# EAGLE board Weather Shield-Panel-v11 (EAGLE 6.5.0)
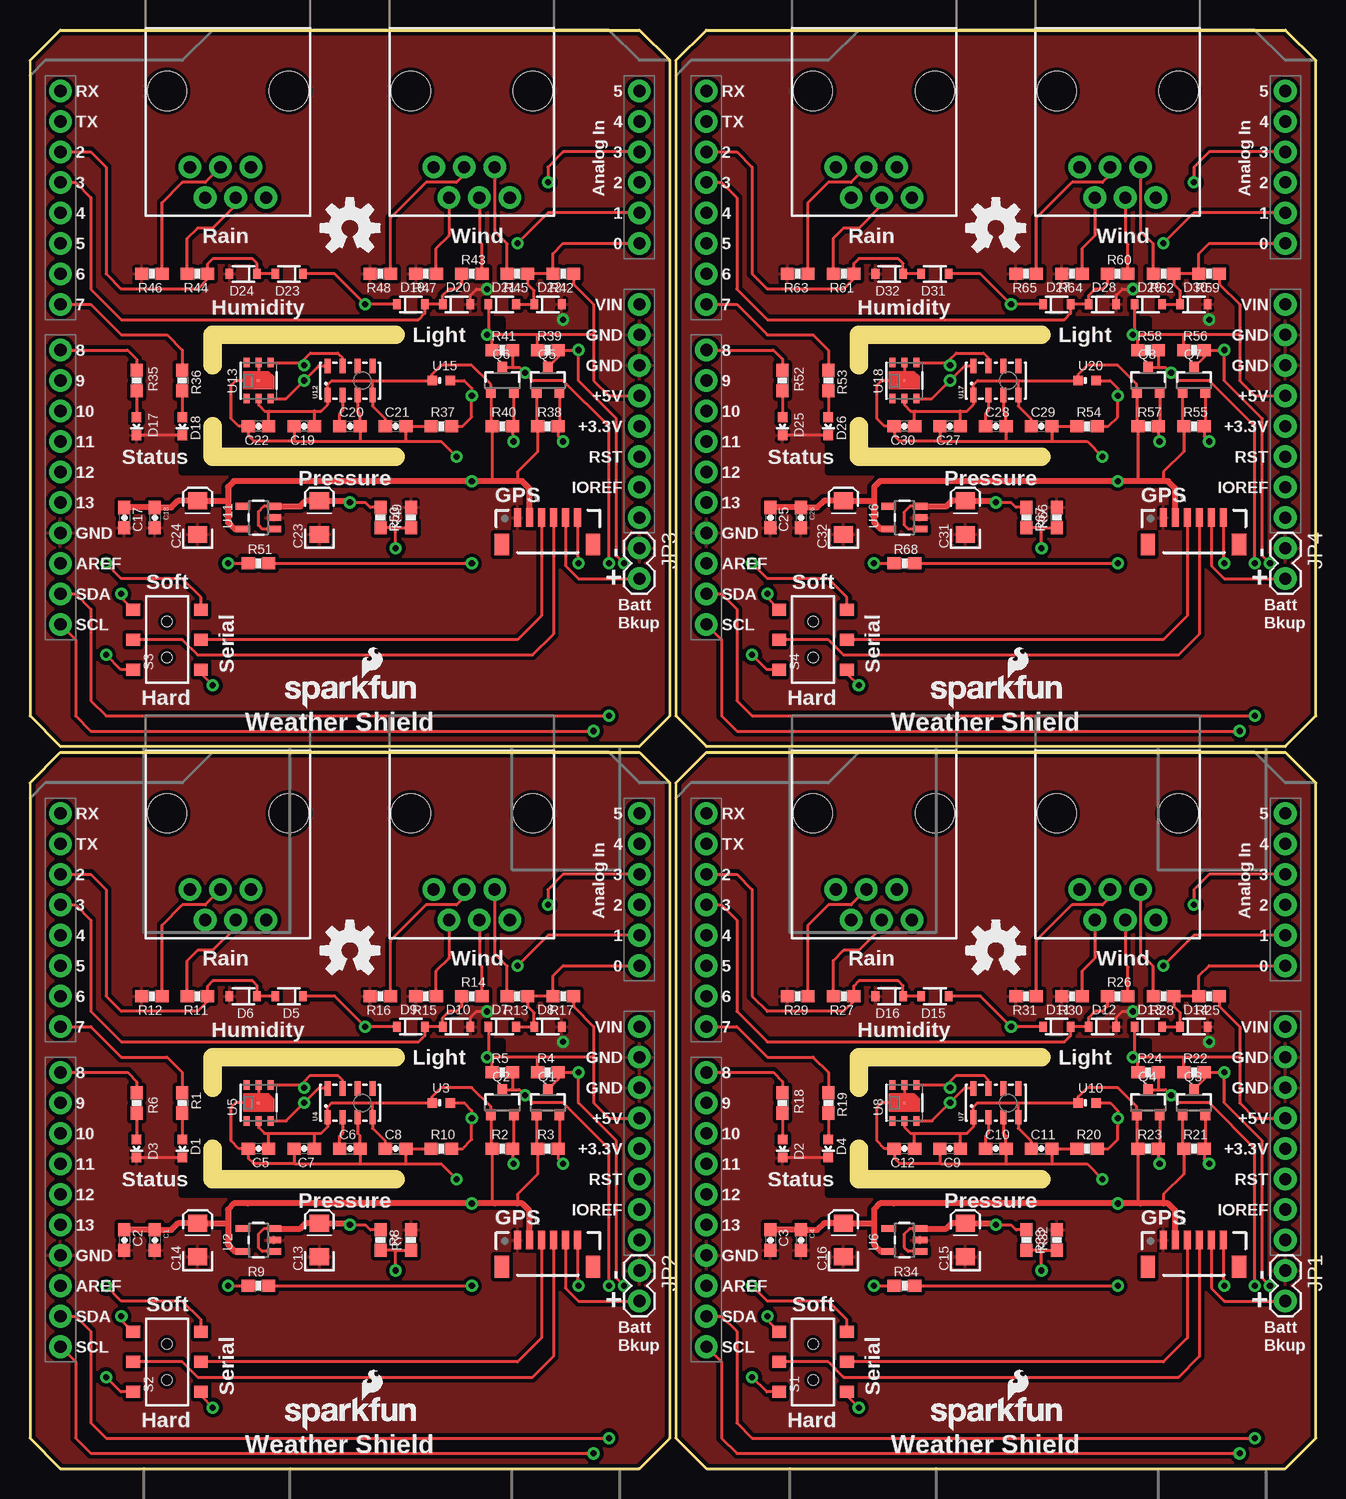
[diagram p0: board, top side]
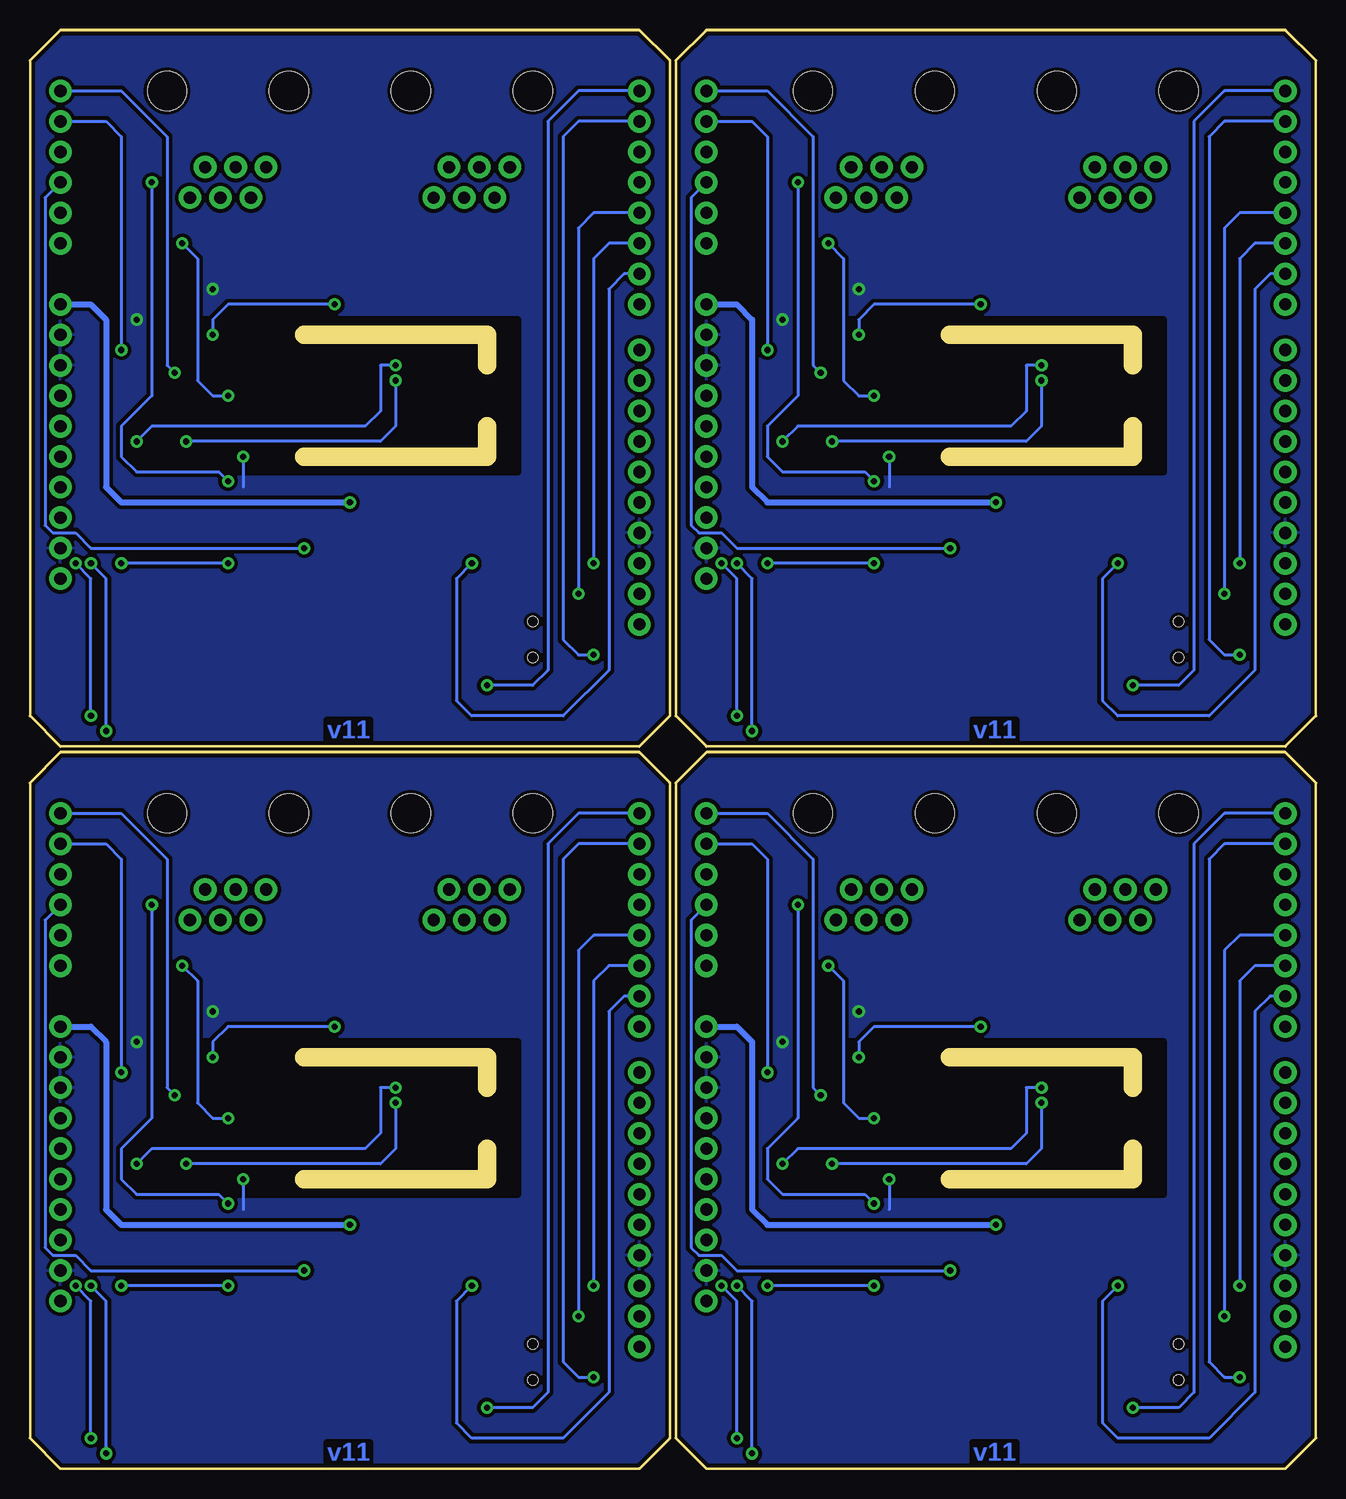
[diagram p1: board, bottom side, seen from below]

Size 107.19 x 119.89 mm. Coordinates in mm from the lower left corner, seen from the top.
Outline: 53.34,2.54 53.34,57.15 50.8,59.69 2.54,59.69 0,57.15 0,2.54 2.54,0 50.8,0 53.34,2.54
Outline: 107.19,2.54 107.19,57.15 104.65,59.69 56.39,59.69 53.85,57.15 53.85,2.54 56.39,0 104.65,0 107.19,2.54
Outline: 53.34,62.74 53.34,117.35 50.8,119.89 2.54,119.89 0,117.35 0,62.74 2.54,60.2 50.8,60.2 53.34,62.74
Outline: 107.19,62.74 107.19,117.35 104.65,119.89 56.39,119.89 53.85,117.35 53.85,62.74 56.39,60.2 104.65,60.2 107.19,62.74
Copper layers (1*16): Top 0.035mm / dielectric 1.5mm / Bottom 0.035mm
Design rules "SparkFun": minimum track width 8mil, minimum drill 20mil, track to track 8mil, track to pad 8mil, pad to pad 8mil, via to via 8mil, smd to smd 8mil, copper to edge 10mil, drill to drill 8mil, minimum pad ring 12mil, minimum via ring 10mil, stop-mask expansion 4mil, vias tented up to drill 20mil, thermal gap 10mil
Net classes: 0 Default: width 0.203 mm; 1 vcc: width 0.203 mm
tRestrict: area 12.7,22.9 to 39.4,35.6; area 66.5,22.9 to 93.2,35.6; area 12.7,83.1 to 39.4,95.8; area 66.5,83.1 to 93.2,95.8
bRestrict: area 12.7,22.9 to 39.4,35.6; area 66.5,22.9 to 93.2,35.6; area 12.7,83.1 to 39.4,95.8; area 66.5,83.1 to 93.2,95.8
Milling: 16 lines

## Footprints (pad centres in the part's own frame; a part is rotated, then mirrored left to right if it is on the bottom)
0603-CAP = smd 1.1 x 1: 1 -0.85,0; 2 0.85,0
EIA3216 = smd 1.4 x 1.6: A 1.4,0; C -1.4,0
LED-0603 = smd 0.8 x 0.8: A 0,-0.75; C 0,0.75
SOD-323 = smd 0.63 x 0.83: 1 -1.15,0; 2 1.15,0
GP-635T = smd 0.6 x 1.55: 1 -2.54,1.27; 2 -1.54,1.27; 3 -0.54,1.27; 4 0.46,1.27; 5 1.46,1.27; 6 2.46,1.27 | smd 1.2 x 1.8: P$1 -3.84,-0.955; P$2 3.76,-0.955
1X02 = drill 1.016 pad 1.88: 1 0,0; 2 2.54,0
RJ11-6 = drill 1.016 pad 1.88: 1 1.905,8.89; 2 3.175,6.35; 3 4.445,8.89; 4 5.715,6.35; 5 6.985,8.89; 6 8.255,6.35 | hole 3.251: 0,0; 10.16,0
SOT23-3 = smd 0.8 x 0.9: 1 -0.95,-1; 2 0.95,-1; 3 0,1.1
0603-RES = smd 1.1 x 1: 1 -0.85,0; 2 0.85,0
AYZ0202 = smd 1 x 1.15: 1 -2.5,2.825; 2 0,2.825; 3 2.5,2.825; 4 -2.5,-2.825; 5 0,-2.825; 6 2.5,-2.825 | hole 0.85: 1.5,0; -1.5,0
UNO_R3_SHIELD = drill 1.016 pad 1.88: 3.3V 50.8,26.67; 5V 50.8,29.21; A0 50.8,41.91; A1 50.8,44.45; A2 50.8,46.99; A3 50.8,49.53; A4 50.8,52.07; A5 50.8,54.61; AREF 2.54,15.24; D2 2.54,49.53; D3 2.54,46.99; D4 2.54,44.45; D5 2.54,41.91; D6 2.54,39.37; D7 2.54,36.83; D8 2.54,33.02; D9 2.54,30.48; D10 2.54,27.94; D11 2.54,25.4; D12 2.54,22.86; D13 2.54,20.32; GND@0 50.8,31.75; GND@1 50.8,34.29; GND@2 2.54,17.78; IOREF 50.8,21.59; NC 50.8,19.05; RES 50.8,24.13; RX 2.54,54.61; SCL 2.54,10.16; SDA 2.54,12.7; TX 2.54,52.07; VIN 50.8,36.83
SOT23-5 = smd 0.55 x 1.2: 1 -0.95,-1.3; 2 0,-1.3; 3 0.95,-1.3; 4 0.95,1.3; 5 -0.95,1.3
ALS-PT19 = smd 0.8 x 0.8: C -0.75,0; E 0.75,0
LGA8 = smd 1.2 x 0.5: 1 -1.2,1.875; 2 -1.2,0.625; 3 -1.2,-0.625; 4 -1.2,-1.875; 5 1.2,-1.875; 6 1.2,-0.625; 7 1.2,0.625; 8 1.2,1.875
HTU21D = smd 0.2 x 0.2: 7 0,0 | smd 0.8 x 0.5: DATA 1.5,-1; GND 1.5,0; NC@1 -1.5,1; NC@6 1.5,1; SCK -1.5,-1; VDD -1.5,0

## Placement (x,y rotation side)
C1  1uF  [0603-CAP]  10.41,19.05 270 top
C2  0.1uF  [0603-CAP]  7.87,19.05 270 top
C3  0.1uF  [0603-CAP]  61.72,19.05 270 top
C4  1uF  [0603-CAP]  64.26,19.05 270 top
C5  0.1uF  [0603-CAP]  19.05,26.67 180 top
C6  0.1uF  [0603-CAP]  26.67,26.67 0 top
C7  0.1uF  [0603-CAP]  22.86,26.67 180 top
C8  1uF  [0603-CAP]  30.48,26.67 0 top
C9  0.1uF  [0603-CAP]  76.71,26.67 180 top
C10  0.1uF  [0603-CAP]  80.52,26.67 0 top
C11  1uF  [0603-CAP]  84.33,26.67 0 top
C12  0.1uF  [0603-CAP]  72.9,26.67 180 top
C13  10uF  [EIA3216]  24.13,19.05 90 top
C14  10uF  [EIA3216]  13.97,19.05 90 top
C15  10uF  [EIA3216]  77.98,19.05 90 top
C16  10uF  [EIA3216]  67.82,19.05 90 top
C17  0.1uF  [0603-CAP]  7.87,79.25 270 top
C18  1uF  [0603-CAP]  10.41,79.25 270 top
C19  0.1uF  [0603-CAP]  22.86,86.87 180 top
C20  0.1uF  [0603-CAP]  26.67,86.87 0 top
C21  1uF  [0603-CAP]  30.48,86.87 0 top
C22  0.1uF  [0603-CAP]  19.05,86.87 180 top
C23  10uF  [EIA3216]  24.13,79.25 90 top
C24  10uF  [EIA3216]  13.97,79.25 90 top
C25  0.1uF  [0603-CAP]  61.72,79.25 270 top
C26  1uF  [0603-CAP]  64.26,79.25 270 top
C27  0.1uF  [0603-CAP]  76.71,86.87 180 top
C28  0.1uF  [0603-CAP]  80.52,86.87 0 top
C29  1uF  [0603-CAP]  84.33,86.87 0 top
C30  0.1uF  [0603-CAP]  72.9,86.87 180 top
C31  10uF  [EIA3216]  77.98,79.25 90 top
C32  10uF  [EIA3216]  67.82,79.25 90 top
D1  Blue  [LED-0603]  12.7,26.67 180 top
D2  Green  [LED-0603]  62.74,26.67 180 top
D3  Green  [LED-0603]  8.89,26.67 180 top
D4  Blue  [LED-0603]  66.55,26.67 180 top
D5  BAS16  [SOD-323]  21.59,39.37 180 top
D6  BAS16  [SOD-323]  17.78,39.37 180 top
D7  BAS16  [SOD-323]  39.37,36.83 0 top
D8  BAS16  [SOD-323]  43.18,36.83 0 top
D9  BAS16  [SOD-323]  31.75,36.83 0 top
D10  BAS16  [SOD-323]  35.56,36.83 0 top
D11  BAS16  [SOD-323]  85.6,36.83 0 top
D12  BAS16  [SOD-323]  89.41,36.83 0 top
D13  BAS16  [SOD-323]  93.22,36.83 0 top
D14  BAS16  [SOD-323]  97.03,36.83 0 top
D15  BAS16  [SOD-323]  75.44,39.37 180 top
D16  BAS16  [SOD-323]  71.63,39.37 180 top
D17  Green  [LED-0603]  8.89,86.87 180 top
D18  Blue  [LED-0603]  12.7,86.87 180 top
D19  BAS16  [SOD-323]  31.75,97.03 0 top
D20  BAS16  [SOD-323]  35.56,97.03 0 top
D21  BAS16  [SOD-323]  39.37,97.03 0 top
D22  BAS16  [SOD-323]  43.18,97.03 0 top
D23  BAS16  [SOD-323]  21.59,99.57 180 top
D24  BAS16  [SOD-323]  17.78,99.57 180 top
D25  Green  [LED-0603]  62.74,86.87 180 top
D26  Blue  [LED-0603]  66.55,86.87 180 top
D27  BAS16  [SOD-323]  85.6,97.03 0 top
D28  BAS16  [SOD-323]  89.41,97.03 0 top
D29  BAS16  [SOD-323]  93.22,97.03 0 top
D30  BAS16  [SOD-323]  97.03,97.03 0 top
D31  BAS16  [SOD-323]  75.44,99.57 180 top
D32  BAS16  [SOD-323]  71.63,99.57 180 top
J1  GP-635T  [GP-635T]  43.18,17.78 0 top
J2  GP-635T  [GP-635T]  97.03,17.78 0 top
J3  GP-635T  [GP-635T]  43.18,77.98 0 top
J4  GP-635T  [GP-635T]  97.03,77.98 0 top
JP1  External Batt Bckup  [1X02]  104.65,16.51 270 top
JP2  External Batt Bckup  [1X02]  50.8,16.51 270 top
JP3  External Batt Bckup  [1X02]  50.8,76.71 270 top
JP4  External Batt Bckup  [1X02]  104.65,76.71 270 top
JP9-DNP  RJ11-RAIN  [RJ11-6]  21.59,54.61 180 top
JP9-DNP1  RJ11-RAIN  [RJ11-6]  75.44,54.61 180 top
JP9-DNP2  RJ11-RAIN  [RJ11-6]  21.59,114.81 180 top
JP9-DNP3  RJ11-RAIN  [RJ11-6]  75.44,114.81 180 top
JP10-DNP  RJ11-WIND  [RJ11-6]  41.91,54.61 180 top
JP10-DNP1  RJ11-WIND  [RJ11-6]  95.76,54.61 180 top
JP10-DNP2  RJ11-WIND  [RJ11-6]  41.91,114.81 180 top
JP10-DNP3  RJ11-WIND  [RJ11-6]  95.76,114.81 180 top
LOGO1  OSHW-LOGOM  [OSHW-LOGO-M]  26.67,43.18 0 top
LOGO2  SFE_LOGO_NAME_FLAME.1_INCH  [SFE_LOGO_NAME_FLAME_.1]  20.83,3.05 0 top
LOGO3  SFE_LOGO_NAME_FLAME.1_INCH  [SFE_LOGO_NAME_FLAME_.1]  74.68,3.05 0 top
LOGO4  OSHW-LOGOM  [OSHW-LOGO-M]  80.52,43.18 0 top
LOGO5  SFE_LOGO_NAME_FLAME.1_INCH  [SFE_LOGO_NAME_FLAME_.1]  20.83,63.25 0 top
LOGO6  OSHW-LOGOM  [OSHW-LOGO-M]  26.67,103.38 0 top
LOGO7  SFE_LOGO_NAME_FLAME.1_INCH  [SFE_LOGO_NAME_FLAME_.1]  74.68,63.25 0 top
LOGO8  OSHW-LOGOM  [OSHW-LOGO-M]  80.52,103.38 0 top
Q1  BSS138  [SOT23-3]  43.18,30.48 0 top
Q2  BSS138  [SOT23-3]  39.37,30.48 0 top
Q3  BSS138  [SOT23-3]  97.03,30.48 0 top
Q4  BSS138  [SOT23-3]  93.22,30.48 0 top
Q5  BSS138  [SOT23-3]  43.18,90.68 0 top
Q6  BSS138  [SOT23-3]  39.37,90.68 0 top
Q7  BSS138  [SOT23-3]  97.03,90.68 0 top
Q8  BSS138  [SOT23-3]  93.22,90.68 0 top
R1  1K  [0603-RES]  12.7,30.48 270 top
R2  4.7K  [0603-RES]  39.37,26.67 0 top
R3  4.7K  [0603-RES]  43.18,26.67 0 top
R4  4.7K  [0603-RES]  43.18,33.02 0 top
R5  4.7K  [0603-RES]  39.37,33.02 0 top
R6  1K  [0603-RES]  8.89,30.48 270 top
R7  1K  [0603-RES]  31.75,19.05 90 top
R8  3.9K  [0603-RES]  29.21,19.05 270 top
R9  4.7K  [0603-RES]  19.05,15.24 0 top
R10  10K  [0603-RES]  34.29,26.67 0 top
R11  1K  [0603-RES]  13.97,39.37 180 top
R12  1K  [0603-RES]  10.16,39.37 180 top
R13  1K  [0603-RES]  40.64,39.37 180 top
R14  1K  [0603-RES]  36.83,39.37 0 top
R15  1K  [0603-RES]  33.02,39.37 180 top
R16  1K  [0603-RES]  29.21,39.37 180 top
R17  4.7K  [0603-RES]  44.45,39.37 180 top
R18  1K  [0603-RES]  62.74,30.48 270 top
R19  1K  [0603-RES]  66.55,30.48 270 top
R20  10K  [0603-RES]  88.14,26.67 0 top
R21  4.7K  [0603-RES]  97.03,26.67 0 top
R22  4.7K  [0603-RES]  97.03,33.02 0 top
R23  4.7K  [0603-RES]  93.22,26.67 0 top
R24  4.7K  [0603-RES]  93.22,33.02 0 top
R25  4.7K  [0603-RES]  98.3,39.37 180 top
R26  1K  [0603-RES]  90.68,39.37 0 top
R27  1K  [0603-RES]  67.82,39.37 180 top
R28  1K  [0603-RES]  94.49,39.37 180 top
R29  1K  [0603-RES]  64.01,39.37 180 top
R30  1K  [0603-RES]  86.87,39.37 180 top
R31  1K  [0603-RES]  83.06,39.37 180 top
R32  1K  [0603-RES]  85.6,19.05 90 top
R33  3.9K  [0603-RES]  83.06,19.05 270 top
R34  4.7K  [0603-RES]  72.9,15.24 0 top
R35  1K  [0603-RES]  8.89,90.68 270 top
R36  1K  [0603-RES]  12.7,90.68 270 top
R37  10K  [0603-RES]  34.29,86.87 0 top
R38  4.7K  [0603-RES]  43.18,86.87 0 top
R39  4.7K  [0603-RES]  43.18,93.22 0 top
R40  4.7K  [0603-RES]  39.37,86.87 0 top
R41  4.7K  [0603-RES]  39.37,93.22 0 top
R42  4.7K  [0603-RES]  44.45,99.57 180 top
R43  1K  [0603-RES]  36.83,99.57 0 top
R44  1K  [0603-RES]  13.97,99.57 180 top
R45  1K  [0603-RES]  40.64,99.57 180 top
R46  1K  [0603-RES]  10.16,99.57 180 top
R47  1K  [0603-RES]  33.02,99.57 180 top
R48  1K  [0603-RES]  29.21,99.57 180 top
R49  1K  [0603-RES]  31.75,79.25 90 top
R50  3.9K  [0603-RES]  29.21,79.25 270 top
R51  4.7K  [0603-RES]  19.05,75.44 0 top
R52  1K  [0603-RES]  62.74,90.68 270 top
R53  1K  [0603-RES]  66.55,90.68 270 top
R54  10K  [0603-RES]  88.14,86.87 0 top
R55  4.7K  [0603-RES]  97.03,86.87 0 top
R56  4.7K  [0603-RES]  97.03,93.22 0 top
R57  4.7K  [0603-RES]  93.22,86.87 0 top
R58  4.7K  [0603-RES]  93.22,93.22 0 top
R59  4.7K  [0603-RES]  98.3,99.57 180 top
R60  1K  [0603-RES]  90.68,99.57 0 top
R61  1K  [0603-RES]  67.82,99.57 180 top
R62  1K  [0603-RES]  94.49,99.57 180 top
R63  1K  [0603-RES]  64.01,99.57 180 top
R64  1K  [0603-RES]  86.87,99.57 180 top
R65  1K  [0603-RES]  83.06,99.57 180 top
R66  1K  [0603-RES]  85.6,79.25 90 top
R67  3.9K  [0603-RES]  83.06,79.25 270 top
R68  4.7K  [0603-RES]  72.9,75.44 0 top
S1  Serial Select  [AYZ0202]  65.28,8.89 90 top
S2  Serial Select  [AYZ0202]  11.43,8.89 90 top
S3  Serial Select  [AYZ0202]  11.43,69.09 90 top
S4  Serial Select  [AYZ0202]  65.28,69.09 90 top
U1  ARDUINO_R3_SHIELD  [UNO_R3_SHIELD]  0,0 0 top
U2  3.3V MIC5219  [SOT23-5]  19.05,19.05 90 top
U3  ALS-PT19  [ALS-PT19]  34.29,30.48 0 top
U4  MPL3115A2LGA8  [LGA8]  26.67,30.48 90 top
U5  HTU21D  [HTU21D]  19.05,30.48 90 top
U6  3.3V MIC5219  [SOT23-5]  72.9,19.05 90 top
U7  MPL3115A2LGA8  [LGA8]  80.52,30.48 90 top
U8  HTU21D  [HTU21D]  72.9,30.48 90 top
U9  ARDUINO_R3_SHIELD  [UNO_R3_SHIELD]  53.85,0 0 top
U10  ALS-PT19  [ALS-PT19]  88.14,30.48 0 top
U11  3.3V MIC5219  [SOT23-5]  19.05,79.25 90 top
U12  MPL3115A2LGA8  [LGA8]  26.67,90.68 90 top
U13  HTU21D  [HTU21D]  19.05,90.68 90 top
U14  ARDUINO_R3_SHIELD  [UNO_R3_SHIELD]  0,60.2 0 top
U15  ALS-PT19  [ALS-PT19]  34.29,90.68 0 top
U16  3.3V MIC5219  [SOT23-5]  72.9,79.25 90 top
U17  MPL3115A2LGA8  [LGA8]  80.52,90.68 90 top
U18  HTU21D  [HTU21D]  72.9,90.68 90 top
U19  ARDUINO_R3_SHIELD  [UNO_R3_SHIELD]  53.85,60.2 0 top
U20  ALS-PT19  [ALS-PT19]  88.14,90.68 0 top

## Library data of the parts
C1-C12 C17-C22 C25-C30 D1-D32 JP9-DNP JP9-DNP1-JP9-DNP3 JP10-DNP JP10-DNP1-JP10-DNP3 Q1-Q8 R1-R9 R11-R19 R21-R36 R38-R53 R55-R68 U2 U6 U11 U16 = SparkFun
C13-C16 C23 C24 C31 C32 R10 R20 R37 R54 = SparkFun-Passives
J1-J4 U3-U5 U7 U8 U10 U12 U13 U15 U17 U18 U20 = SparkFun-Sensors
JP1-JP4 = SparkFun-Connectors
LOGO1-LOGO8 = SparkFun-Aesthetics
S1-S4 = SparkFun-Electromechanical; PROD_ID: SWCH-08179
U1 U9 U14 U19 = SparkFun-Boards

## Nets
3.3V: C1.1 C2.1 C5.1 C7.1 C8.1 C14.A J1.2 Q1.1 Q2.1 R2.1 R3.1 U1.A3 U2.5 U3.C U4.1 U4.4 U5.VDD
3.3V1: C3.1 C4.1 C9.1 C11.1 C12.1 C16.A J2.2 Q3.1 Q4.1 R21.1 R23.1 U6.5 U7.1 U7.4 U8.VDD U9.A3 U10.C
3.3V2: C17.1 C18.1 C19.1 C21.1 C22.1 C24.A J3.2 Q5.1 Q6.1 R38.1 R40.1 U11.5 U12.1 U12.4 U13.VDD U14.A3 U15.C
3.3V3: C25.1 C26.1 C27.1 C29.1 C30.1 C32.A J4.2 Q7.1 Q8.1 R55.1 R57.1 U16.5 U17.1 U17.4 U18.VDD U19.A3 U20.C
3V_PWR_CTL: J1.6 R9.2
3V_PWR_CTL1: J2.6 R34.2
3V_PWR_CTL2: J3.6 R51.2
3V_PWR_CTL3: J4.6 R68.2
5V: D5.1 D7.1 D9.1 R4.1 R5.1 R17.1 U1.5V
5V1: D11.1 D13.1 D15.1 R22.1 R24.1 R25.1 U9.5V
5V2: D19.1 D21.1 D23.1 R39.1 R41.1 R42.1 U14.5V
5V3: D27.1 D29.1 D31.1 R56.1 R58.1 R59.1 U19.5V
BATT_LVL: R7.1 R8.2 U1.A2
BATT_LVL1: R32.1 R33.2 U9.A2
BATT_LVL2: R49.1 R50.2 U14.A2
BATT_LVL3: R66.1 R67.2 U19.A2
GND [vcc]: C1.2 C2.2 C5.2 C6.2 C7.2 C8.2 C13.C C14.C D1.C D3.C D6.2 D8.2 D10.2 J1.1 JP2.1 R7.2 R10.1 R12.2 R15.2 R16.2 U1.GND@0 U1.GND@1 U1.GND@2 U2.2 U4.3 U5.7 U5.GND
GND1 [vcc]: C3.2 C4.2 C9.2 C10.2 C11.2 C12.2 C15.C C16.C D2.C D4.C D12.2 D14.2 D16.2 J2.1 JP1.1 R20.1 R29.2 R30.2 R31.2 R32.2 U6.2 U7.3 U8.7 U8.GND U9.GND@0 U9.GND@1 U9.GND@2
GND2 [vcc]: C17.2 C18.2 C19.2 C20.2 C21.2 C22.2 C23.C C24.C D17.C D18.C D20.2 D22.2 D24.2 J3.1 JP3.1 R37.1 R46.2 R47.2 R48.2 R49.2 U11.2 U12.3 U13.7 U13.GND U14.GND@0 U14.GND@1 U14.GND@2
GND3 [vcc]: C25.2 C26.2 C27.2 C28.2 C29.2 C30.2 C31.C C32.C D25.C D26.C D28.2 D30.2 D32.2 J4.1 JP4.1 R54.1 R63.2 R64.2 R65.2 R66.2 U16.2 U17.3 U18.7 U18.GND U19.GND@0 U19.GND@1 U19.GND@2
GPS-RX: J1.4 S2.2
GPS-RX1: J2.4 S1.2
GPS-RX2: J3.4 S3.2
GPS-RX3: J4.4 S4.2
GPS-TX: J1.3 S2.5
GPS-TX1: J2.3 S1.5
GPS-TX2: J3.3 S3.5
GPS-TX3: J4.3 S4.5
GRXI: S2.6 U1.D5
GRXI1: S1.6 U9.D5
GRXI2: S3.6 U14.D5
GRXI3: S4.6 U19.D5
GTXO: S2.3 U1.D4
GTXO1: S1.3 U9.D4
GTXO2: S3.3 U14.D4
GTXO3: S4.3 U19.D4
HV_SCL: Q2.3 R5.2 U1.A5 U1.SCL
HV_SCL1: Q4.3 R24.2 U9.A5 U9.SCL
HV_SCL2: Q6.3 R41.2 U14.A5 U14.SCL
HV_SCL3: Q8.3 R58.2 U19.A5 U19.SCL
HV_SDA: Q1.3 R4.2 U1.A4 U1.SDA
HV_SDA1: Q3.3 R22.2 U9.A4 U9.SDA
HV_SDA2: Q5.3 R39.2 U14.A4 U14.SDA
HV_SDA3: Q7.3 R56.2 U19.A4 U19.SDA
INT-PRESSURE: U4.6
INT-PRESSURE1: U7.6
INT-PRESSURE2: U12.6
INT-PRESSURE3: U17.6
LIGHT: R10.2 U1.A1 U3.E
LIGHT1: R20.2 U9.A1 U10.E
LIGHT2: R37.2 U14.A1 U15.E
LIGHT3: R54.2 U19.A1 U20.E
N$1: JP10-DNP.3 R14.2
N$2: JP10-DNP.2 R13.2
N$3: D1.A R1.2
N$4: JP9-DNP.3 R11.2
N$5: C6.1 U4.2
N$6: D2.A R18.2
N$7: D3.A R6.2
N$8: D4.A R19.2
N$9: C10.1 U7.2
N$10: JP10-DNP1.2 R28.2
N$11: JP9-DNP.4 R12.1
N$12: JP10-DNP.5 R15.1
N$13: JP10-DNP.4 R16.1
N$14: JP10-DNP1.3 R26.2
N$15: JP9-DNP1.3 R27.2
N$16: JP9-DNP1.4 R29.1
N$17: JP10-DNP1.5 R30.1
N$18: JP10-DNP1.4 R31.1
N$19: D17.A R35.2
N$20: D18.A R36.2
N$21: C20.1 U12.2
N$22: JP10-DNP2.2 R45.2
N$23: JP10-DNP2.3 R43.2
N$24: JP9-DNP2.3 R44.2
N$25: JP9-DNP2.4 R46.1
N$26: JP10-DNP2.5 R47.1
N$27: JP10-DNP2.4 R48.1
N$28: D25.A R52.2
N$29: D26.A R53.2
N$30: C28.1 U17.2
N$31: JP10-DNP3.2 R62.2
N$32: JP10-DNP3.3 R60.2
N$33: JP9-DNP3.3 R61.2
N$34: JP9-DNP3.4 R63.1
N$35: JP10-DNP3.5 R64.1
N$36: JP10-DNP3.4 R65.1
PWR_CTL: R9.1 U1.D6
PWR_CTL1: R34.1 U9.D6
PWR_CTL2: R51.1 U14.D6
PWR_CTL3: R68.1 U19.D6
RAIN: D5.2 D6.1 R11.1 U1.D2
RAIN1: D15.2 D16.1 R27.1 U9.D2
RAIN2: JP9-DNP.2
RAIN3: JP9-DNP1.2
RAIN4: JP9-DNP1.5
RAIN5: JP9-DNP.5
RAIN6: D23.2 D24.1 R44.1 U14.D2
RAIN7: JP9-DNP2.2
RAIN8: JP9-DNP2.5
RAIN9: D31.2 D32.1 R61.1 U19.D2
RAIN10: JP9-DNP3.2
RAIN11: JP9-DNP3.5
RAW [vcc]: C13.A R8.1 U1.VIN U2.1 U2.3
RAW1 [vcc]: C15.A R33.1 U6.1 U6.3 U9.VIN
RAW2 [vcc]: C23.A R50.1 U11.1 U11.3 U14.VIN
RAW3 [vcc]: C31.A R67.1 U16.1 U16.3 U19.VIN
RXI: S2.4 U1.RX
RXI1: S1.4 U9.RX
RXI2: S3.4 U14.RX
RXI3: S4.4 U19.RX
SCL: Q2.2 R2.2 U4.8 U5.SCK
SCL1: Q4.2 R23.2 U7.8 U8.SCK
SCL2: Q6.2 R40.2 U12.8 U13.SCK
SCL3: Q8.2 R57.2 U17.8 U18.SCK
SDA: Q1.2 R3.2 U4.7 U5.DATA
SDA1: Q3.2 R21.2 U7.7 U8.DATA
SDA2: Q5.2 R38.2 U12.7 U13.DATA
SDA3: Q7.2 R55.2 U17.7 U18.DATA
STAT1: R1.1 U1.D7
STAT2: R6.1 U1.D8
STAT3: R18.1 U9.D8
STAT4: R19.1 U9.D7
STAT5: R35.1 U14.D8
STAT6: R36.1 U14.D7
STAT7: R52.1 U19.D8
STAT8: R53.1 U19.D7
TXO: S2.1 U1.TX
TXO1: S1.1 U9.TX
TXO2: S3.1 U14.TX
TXO3: S4.1 U19.TX
V_BATT: J1.5 JP2.2
V_BATT1: J2.5 JP1.2
V_BATT2: J3.5 JP3.2
V_BATT3: J4.5 JP4.2
WDIR: D7.2 D8.1 R13.1 R17.2 U1.A0
WDIR1: D13.2 D14.1 R25.2 R28.1 U9.A0
WDIR2: D21.2 D22.1 R42.2 R45.1 U14.A0
WDIR3: D29.2 D30.1 R59.2 R62.1 U19.A0
WSPEED: D9.2 D10.1 R14.1 U1.D3
WSPEED1: D11.2 D12.1 R26.1 U9.D3
WSPEED2: D19.2 D20.1 R43.1 U14.D3
WSPEED3: D27.2 D28.1 R60.1 U19.D3

## Tracks (layer width: path | path; a pad name or v marks a point on that pad's centre or on a via)
3.3V  (via drill 0.51)
  Top 0.254: C7.1 23.71,27.9 | C8.1 29.63,27.27 28.55,28.35 U4.4 28.55,30.45 28.57,30.48 | 28.57,30.48 25.15,30.48 24.8,30.13 U4.1 24.8,28.48 24.26,27.94 23.75,27.94 23.71,27.9 | 28.57,30.48 U3.C 33.54,31 34.29,31.75 36.83,31.75 38.42,30.16 Q2.1 38.42,26.77 R2.1 38.52,22.31 38.73,22.1 | U1.A3 44.45,49.53 43.18,48.26 v43.18,46.99 | 18.2,22.14 18.16,22.1 | 40.64,22.1 40.64,22.86 42.33,24.55 R3.1 42.23,26.77 Q1.1 | U5.VDD 19.05,28.45 19.56,27.94 19.94,27.94 | 19.94,27.94 23.67,27.94 23.71,27.9 | C5.1 19.9,27.9 19.94,27.94
  Top 0.508: C2.1 C1.1 11.77,19.9 12.32,20.45 C14.A 16.38,20.45 16.51,20.32 | J1.2 41.64,21.48 41.02,22.1 40.64,22.1 38.73,22.1 v36.83,22.1 18.16,22.1 17.02,22.1 16.51,21.59 16.51,20.32 | 16.51,20.32 16.51,18.67 17.08,18.1 U2.5
  Bottom 0.254: v43.18,46.99 43.18,29.21 45.72,26.67 45.72,24.13 44.45,22.86 37.59,22.86 v36.83,22.1
3.3V1  (via drill 0.51)
  Top 0.254: C9.1 77.56,27.9 | C11.1 83.48,27.27 82.39,28.35 U7.4 82.39,30.45 82.42,30.48 | 82.42,30.48 78.99,30.48 78.64,30.13 U7.1 78.64,28.48 78.11,27.94 77.6,27.94 77.56,27.9 | 82.42,30.48 U10.C 87.39,31 88.14,31.75 90.68,31.75 92.27,30.16 Q4.1 92.27,26.77 R23.1 92.37,22.31 92.58,22.1 | U9.A3 98.3,49.53 97.03,48.26 v97.03,46.99 | 72.05,22.14 72.01,22.1 | 94.49,22.1 94.49,22.86 96.18,24.55 R21.1 96.08,26.77 Q3.1 | U8.VDD 72.9,28.45 73.41,27.94 73.79,27.94 | 73.79,27.94 77.52,27.94 77.56,27.9 | C12.1 73.75,27.9 73.79,27.94
  Top 0.508: C3.1 C4.1 65.62,19.9 66.17,20.45 C16.A 70.23,20.45 70.36,20.32 | J2.2 95.49,21.48 94.87,22.1 94.49,22.1 92.58,22.1 v90.68,22.1 72.01,22.1 70.87,22.1 70.36,21.59 70.36,20.32 | 70.36,20.32 70.36,18.67 70.93,18.1 U6.5
  Bottom 0.254: v97.03,46.99 97.03,29.21 99.57,26.67 99.57,24.13 98.3,22.86 91.44,22.86 v90.68,22.1
3.3V2  (via drill 0.51)
  Top 0.254: C19.1 23.71,88.1 | C21.1 29.63,87.46 28.55,88.55 U12.4 28.55,90.65 28.57,90.68 | 28.57,90.68 25.15,90.68 24.8,90.33 U12.1 24.8,88.68 24.26,88.14 23.75,88.14 23.71,88.1 | 28.57,90.68 U15.C 33.54,91.2 34.29,91.95 36.83,91.95 38.42,90.36 Q6.1 38.42,86.97 R40.1 38.52,82.51 38.73,82.3 | U14.A3 44.45,109.73 43.18,108.46 v43.18,107.19 | 18.2,82.33 18.16,82.3 | 40.64,82.3 40.64,83.06 42.33,84.75 R38.1 42.23,86.97 Q5.1 | U13.VDD 19.05,88.65 19.56,88.14 19.94,88.14 | 19.94,88.14 23.67,88.14 23.71,88.1 | C22.1 19.9,88.1 19.94,88.14
  Top 0.508: C17.1 C18.1 11.77,80.1 12.32,80.65 C24.A 16.38,80.65 16.51,80.52 | J3.2 41.64,81.68 41.02,82.3 40.64,82.3 38.73,82.3 v36.83,82.3 18.16,82.3 17.02,82.3 16.51,81.79 16.51,80.52 | 16.51,80.52 16.51,78.87 17.08,78.3 U11.5
  Bottom 0.254: v43.18,107.19 43.18,89.41 45.72,86.87 45.72,84.33 44.45,83.06 37.59,83.06 v36.83,82.3
3.3V3  (via drill 0.51)
  Top 0.254: C27.1 77.56,88.1 | C29.1 83.48,87.46 82.39,88.55 U17.4 82.39,90.65 82.42,90.68 | 82.42,90.68 78.99,90.68 78.64,90.33 U17.1 78.64,88.68 78.11,88.14 77.6,88.14 77.56,88.1 | 82.42,90.68 U20.C 87.39,91.2 88.14,91.95 90.68,91.95 92.27,90.36 Q8.1 92.27,86.97 R57.1 92.37,82.51 92.58,82.3 | U19.A3 98.3,109.73 97.03,108.46 v97.03,107.19 | 72.05,82.33 72.01,82.3 | 94.49,82.3 94.49,83.06 96.18,84.75 R55.1 96.08,86.97 Q7.1 | U18.VDD 72.9,88.65 73.41,88.14 73.79,88.14 | 73.79,88.14 77.52,88.14 77.56,88.1 | C30.1 73.75,88.1 73.79,88.14
  Top 0.508: C25.1 C26.1 65.62,80.1 66.17,80.65 C32.A 70.23,80.65 70.36,80.52 | J4.2 95.49,81.68 94.87,82.3 94.49,82.3 92.58,82.3 v90.68,82.3 72.01,82.3 70.87,82.3 70.36,81.79 70.36,80.52 | 70.36,80.52 70.36,78.87 70.93,78.3 U16.5
  Bottom 0.254: v97.03,107.19 97.03,89.41 99.57,86.87 99.57,84.33 98.3,83.06 91.44,83.06 v90.68,82.3
3V_PWR_CTL  (via drill 0.51)
  Top 0.254: J1.6 45.64,15.32 v45.72,15.24 | R9.2 v36.83,15.24
  Bottom 0.254: v36.83,15.24 v45.72,15.24
3V_PWR_CTL1  (via drill 0.51)
  Top 0.254: J2.6 99.49,15.32 v99.57,15.24 | R34.2 v90.68,15.24
  Bottom 0.254: v90.68,15.24 v99.57,15.24
3V_PWR_CTL2  (via drill 0.51)
  Top 0.254: J3.6 45.64,75.52 v45.72,75.44 | R51.2 v36.83,75.44
  Bottom 0.254: v36.83,75.44 v45.72,75.44
3V_PWR_CTL3  (via drill 0.51)
  Top 0.254: J4.6 99.49,75.52 v99.57,75.44 | R68.2 v90.68,75.44
  Bottom 0.254: v90.68,75.44 v99.57,75.44
5V  (via drill 0.51)
  Top 0.254: 42.33,32.98 R4.1 42.33,34.2 42.42,34.29 | D9.1 v27.94,36.83 25.4,39.37 D5.1 | 46.99,34.29 42.42,34.29 | 42.42,34.29 v38.1,34.29 | R17.1 45.3,38.52 46.99,36.83 46.99,34.29 | 46.99,34.29 46.99,30.48 48.26,29.21 U1.5V | D7.1 38.22,34.41 v38.1,34.29 | R5.1 38.52,33.87 v38.1,34.29
  Bottom 0.254: v27.94,36.83 36.83,36.83 38.1,35.56 v38.1,34.29
5V1  (via drill 0.51)
  Top 0.254: 96.18,32.98 R22.1 96.18,34.2 96.27,34.29 | D11.1 v81.79,36.83 79.25,39.37 D15.1 | 100.84,34.29 96.27,34.29 | 96.27,34.29 v91.95,34.29 | R25.1 99.15,38.52 100.84,36.83 100.84,34.29 | 100.84,34.29 100.84,30.48 102.11,29.21 U9.5V | D13.1 92.07,34.41 v91.95,34.29 | R24.1 92.37,33.87 v91.95,34.29
  Bottom 0.254: v81.79,36.83 90.68,36.83 91.95,35.56 v91.95,34.29
5V2  (via drill 0.51)
  Top 0.254: 42.33,93.18 R39.1 42.33,94.4 42.42,94.49 | D19.1 v27.94,97.03 25.4,99.57 D23.1 | 46.99,94.49 42.42,94.49 | 42.42,94.49 v38.1,94.49 | R42.1 45.3,98.72 46.99,97.03 46.99,94.49 | 46.99,94.49 46.99,90.68 48.26,89.41 U14.5V | D21.1 38.22,94.61 v38.1,94.49 | R41.1 38.52,94.07 v38.1,94.49
  Bottom 0.254: v27.94,97.03 36.83,97.03 38.1,95.76 v38.1,94.49
5V3  (via drill 0.51)
  Top 0.254: 96.18,93.18 R56.1 96.18,94.4 96.27,94.49 | D27.1 v81.79,97.03 79.25,99.57 D31.1 | 100.84,94.49 96.27,94.49 | 96.27,94.49 v91.95,94.49 | R59.1 99.15,98.72 100.84,97.03 100.84,94.49 | 100.84,94.49 100.84,90.68 102.11,89.41 U19.5V | D29.1 92.07,94.61 v91.95,94.49 | R58.1 92.37,94.07 v91.95,94.49
  Bottom 0.254: v81.79,97.03 90.68,97.03 91.95,95.76 v91.95,94.49
BATT_LVL  (via drill 0.51)
  Top 0.254: v30.48,16.51 30.48,18.2 | 30.48,18.2 R7.1 | 30.48,18.2 R8.2
  Bottom 0.254: U1.A2 52.07,45.72 52.07,18.41 51.44,17.78 49.53,17.78 48.26,16.51 v30.48,16.51
BATT_LVL1  (via drill 0.51)
  Top 0.254: v84.33,16.51 84.33,18.2 | 84.33,18.2 R32.1 | 84.33,18.2 R33.2
  Bottom 0.254: U9.A2 105.92,45.72 105.92,18.41 105.28,17.78 103.38,17.78 102.11,16.51 v84.33,16.51
BATT_LVL2  (via drill 0.51)
  Top 0.254: v30.48,76.71 30.48,78.4 | 30.48,78.4 R49.1 | 30.48,78.4 R50.2
  Bottom 0.254: U14.A2 52.07,105.92 52.07,78.61 51.44,77.98 49.53,77.98 48.26,76.71 v30.48,76.71
BATT_LVL3  (via drill 0.51)
  Top 0.254: v84.33,76.71 84.33,78.4 | 84.33,78.4 R66.1 | 84.33,78.4 R67.2
  Bottom 0.254: U19.A2 105.92,105.92 105.92,78.61 105.28,77.98 103.38,77.98 102.11,76.71 v84.33,76.71
GND  (via drill 0.51)
  Top 0.254: U4.3 27.3,27.95 27.52,27.73 C6.2 27.52,25.49 27.43,25.4 | U5.GND U5.7 17.14,30.48 16.76,30.1 16.76,27.3 17.4,26.67 C5.2 18.2,25.87 18.67,25.4 22.1,25.4 | D10.2 36.71,37.6 37.21,38.1 v38.1,38.1 | 31.33,25.4 C8.2 R10.1 | D1.C D3.C | 22.1,25.4 27.43,25.4 | 27.43,25.4 31.33,25.4 | C7.2 22.01,25.49 22.1,25.4 | 31.33,25.4 34.29,25.4 v35.56,24.13
  Bottom 0.254: v35.56,24.13 35.56,21.59
  other vias: 44.45,35.56
  pour Top (isolate 0.305): 53.34,0 0,0 0,59.69 53.34,59.69
  pour Bottom (isolate 0.305): 53.34,0 0,0 0,59.69 53.34,59.69
GND1  (via drill 0.51)
  Top 0.254: U7.3 81.14,27.95 81.37,27.73 C10.2 81.37,25.49 81.28,25.4 | U8.GND U8.7 70.99,30.48 70.61,30.1 70.61,27.3 71.25,26.67 C12.2 72.05,25.87 72.52,25.4 75.95,25.4 | D12.2 90.56,37.6 91.06,38.1 v91.95,38.1 | 85.18,25.4 C11.2 R20.1 | D4.C D2.C | 75.95,25.4 81.28,25.4 | 81.28,25.4 85.18,25.4 | C9.2 75.86,25.49 75.95,25.4 | 85.18,25.4 88.14,25.4 v89.41,24.13
  Bottom 0.254: v89.41,24.13 89.41,21.59
  other vias: 98.3,35.56
  pour Top (isolate 0.305): 107.19,0 53.85,0 53.85,59.69 107.19,59.69
  pour Bottom (isolate 0.305): 107.19,0 53.85,0 53.85,59.69 107.19,59.69
GND2  (via drill 0.51)
  Top 0.254: U12.3 27.3,88.15 27.52,87.92 C20.2 27.52,85.69 27.43,85.6 | U13.GND U13.7 17.14,90.68 16.76,90.3 16.76,87.5 17.4,86.87 C22.2 18.2,86.07 18.67,85.6 22.1,85.6 | D20.2 36.71,97.8 37.21,98.3 v38.1,98.3 | 31.33,85.6 C21.2 R37.1 | D18.C D17.C | 22.1,85.6 27.43,85.6 | 27.43,85.6 31.33,85.6 | C19.2 22.01,85.69 22.1,85.6 | 31.33,85.6 34.29,85.6 v35.56,84.33
  Bottom 0.254: v35.56,84.33 35.56,81.79
  other vias: 44.45,95.76
  pour Top (isolate 0.305): 53.34,60.2 0,60.2 0,119.89 53.34,119.89
  pour Bottom (isolate 0.305): 53.34,60.2 0,60.2 0,119.89 53.34,119.89
GND3  (via drill 0.51)
  Top 0.254: U17.3 81.14,88.15 81.37,87.92 C28.2 81.37,85.69 81.28,85.6 | U18.GND U18.7 70.99,90.68 70.61,90.3 70.61,87.5 71.25,86.87 C30.2 72.05,86.07 72.52,85.6 75.95,85.6 | D28.2 90.56,97.8 91.06,98.3 v91.95,98.3 | 85.18,85.6 C29.2 R54.1 | D26.C D25.C | 75.95,85.6 81.28,85.6 | 81.28,85.6 85.18,85.6 | C27.2 75.86,85.69 75.95,85.6 | 85.18,85.6 88.14,85.6 v89.41,84.33
  Bottom 0.254: v89.41,84.33 89.41,81.79
  other vias: 98.3,95.76
  pour Top (isolate 0.305): 107.19,60.2 53.85,60.2 53.85,119.89 107.19,119.89
  pour Bottom (isolate 0.305): 107.19,60.2 53.85,60.2 53.85,119.89 107.19,119.89
GPS-RX
  Top 0.254: S2.2 12.7,8.89 13.97,7.62 41.91,7.62 43.64,9.35 J1.4
GPS-RX1
  Top 0.254: S1.2 66.55,8.89 67.82,7.62 95.76,7.62 97.49,9.35 J2.4
GPS-RX2
  Top 0.254: S3.2 12.7,69.09 13.97,67.82 41.91,67.82 43.64,69.55 J3.4
GPS-RX3
  Top 0.254: S4.2 66.55,69.09 67.82,67.82 95.76,67.82 97.49,69.55 J4.4
GPS-TX
  Top 0.254: J1.3 42.64,10.89 40.64,8.89 S2.5
GPS-TX1
  Top 0.254: J2.3 96.49,10.89 94.49,8.89 S1.5
GPS-TX2
  Top 0.254: J3.3 42.64,71.09 40.64,69.09 S3.5
GPS-TX3
  Top 0.254: J4.3 96.49,71.09 94.49,69.09 S4.5
GRXI  (via drill 0.51)
  Top 0.254: S2.6 14.26,12.41 12.7,13.97 7.62,13.97 v6.35,15.24
  Bottom 0.254: U1.D5 5.08,41.91 6.35,40.64 v6.35,15.24
GRXI1  (via drill 0.51)
  Top 0.254: S1.6 68.1,12.41 66.55,13.97 61.47,13.97 v60.2,15.24
  Bottom 0.254: U9.D5 58.93,41.91 60.2,40.64 v60.2,15.24
GRXI2  (via drill 0.51)
  Top 0.254: S3.6 14.26,72.61 12.7,74.17 7.62,74.17 v6.35,75.44
  Bottom 0.254: U14.D5 5.08,102.11 6.35,100.84 v6.35,75.44
GRXI3  (via drill 0.51)
  Top 0.254: S4.6 68.1,72.61 66.55,74.17 61.47,74.17 v60.2,75.44
  Bottom 0.254: U19.D5 58.93,102.11 60.2,100.84 v60.2,75.44
GTXO  (via drill 0.51)
  Top 0.254: S2.3 7.62,12.38 v7.62,12.7
  Bottom 0.254: U1.D4 6.35,44.45 7.62,43.18 v7.62,12.7
GTXO1  (via drill 0.51)
  Top 0.254: S1.3 61.47,12.38 v61.47,12.7
  Bottom 0.254: U9.D4 60.2,44.45 61.47,43.18 v61.47,12.7
GTXO2  (via drill 0.51)
  Top 0.254: S3.3 7.62,72.57 v7.62,72.9
  Bottom 0.254: U14.D4 6.35,104.65 7.62,103.38 v7.62,72.9
GTXO3  (via drill 0.51)
  Top 0.254: S4.3 61.47,72.57 v61.47,72.9
  Bottom 0.254: U19.D4 60.2,104.65 61.47,103.38 v61.47,72.9
HV_SCL  (via drill 0.51)
  Top 0.254: Q2.3 40.13,31.58 | 40.13,31.58 40.81,31.58 v41.27,31.11 41.91,30.48 44.45,30.48 48.26,26.67 v48.26,15.24 | R5.2 40.22,31.67 40.13,31.58 | v46.99,1.27 5.08,1.27 3.81,2.54 3.81,8.89 U1.SCL
  Bottom 0.254: U1.A5 45.72,54.61 41.91,50.8 41.91,31.75 v41.27,31.11 | v46.99,1.27 46.99,13.97 v48.26,15.24
HV_SCL1  (via drill 0.51)
  Top 0.254: Q4.3 93.98,31.58 | 93.98,31.58 94.66,31.58 v95.12,31.11 95.76,30.48 98.3,30.48 102.11,26.67 v102.11,15.24 | R24.2 94.07,31.67 93.98,31.58 | v100.84,1.27 58.93,1.27 57.66,2.54 57.66,8.89 U9.SCL
  Bottom 0.254: U9.A5 99.57,54.61 95.76,50.8 95.76,31.75 v95.12,31.11 | v100.84,1.27 100.84,13.97 v102.11,15.24
HV_SCL2  (via drill 0.51)
  Top 0.254: Q6.3 40.13,91.78 | 40.13,91.78 40.81,91.78 v41.27,91.31 41.91,90.68 44.45,90.68 48.26,86.87 v48.26,75.44 | R41.2 40.22,91.87 40.13,91.78 | v46.99,61.47 5.08,61.47 3.81,62.74 3.81,69.09 U14.SCL
  Bottom 0.254: U14.A5 45.72,114.81 41.91,111 41.91,91.95 v41.27,91.31 | v46.99,61.47 46.99,74.17 v48.26,75.44
HV_SCL3  (via drill 0.51)
  Top 0.254: Q8.3 93.98,91.78 | 93.98,91.78 94.66,91.78 v95.12,91.31 95.76,90.68 98.3,90.68 102.11,86.87 v102.11,75.44 | R58.2 94.07,91.87 93.98,91.78 | v100.84,61.47 58.93,61.47 57.66,62.74 57.66,69.09 U19.SCL
  Bottom 0.254: U19.A5 99.57,114.81 95.76,111 95.76,91.95 v95.12,91.31 | v100.84,61.47 100.84,74.17 v102.11,75.44
HV_SDA  (via drill 0.51)
  Top 0.254: Q1.3 44.03,32.43 R4.2 v45.72,33.02 45.72,30.48 48.9,27.3 48.9,15.88 v49.53,15.24 | U1.SDA 3.81,12.7 5.08,11.43 5.08,3.81 6.35,2.54 v48.26,2.54
  Bottom 0.254: U1.A4 46.99,52.07 45.72,50.8 v45.72,33.02 | v48.26,2.54 48.26,13.97 v49.53,15.24
HV_SDA1  (via drill 0.51)
  Top 0.254: Q3.3 97.88,32.43 R22.2 v99.57,33.02 99.57,30.48 102.74,27.3 102.74,15.88 v103.38,15.24 | U9.SDA 57.66,12.7 58.93,11.43 58.93,3.81 60.2,2.54 v102.11,2.54
  Bottom 0.254: U9.A4 100.84,52.07 99.57,50.8 v99.57,33.02 | v102.11,2.54 102.11,13.97 v103.38,15.24
HV_SDA2  (via drill 0.51)
  Top 0.254: Q5.3 44.03,92.63 R39.2 v45.72,93.22 45.72,90.68 48.9,87.5 48.9,76.07 v49.53,75.44 | U14.SDA 3.81,72.9 5.08,71.63 5.08,64.01 6.35,62.74 v48.26,62.74
  Bottom 0.254: U14.A4 46.99,112.27 45.72,111 v45.72,93.22 | v48.26,62.74 48.26,74.17 v49.53,75.44
HV_SDA3  (via drill 0.51)
  Top 0.254: Q7.3 97.88,92.63 R56.2 v99.57,93.22 99.57,90.68 102.74,87.5 102.74,76.07 v103.38,75.44 | U19.SDA 57.66,72.9 58.93,71.63 58.93,64.01 60.2,62.74 v102.11,62.74
  Bottom 0.254: U19.A4 100.84,112.27 99.57,111 v99.57,93.22 | v102.11,62.74 102.11,74.17 v103.38,75.44
LIGHT  (via drill 0.51)
  Top 0.254: U1.A1 43.18,44.45 v40.64,41.91 | U3.E 36.2,30.48 36.83,29.84 v36.83,29.21 36.83,27.43 36.07,26.67 R10.2
  Bottom 0.254: v40.64,41.91 39.37,40.64 39.37,30.48 38.1,29.21 v36.83,29.21
LIGHT1  (via drill 0.51)
  Top 0.254: U9.A1 97.03,44.45 v94.49,41.91 | U10.E 90.04,30.48 90.68,29.84 v90.68,29.21 90.68,27.43 89.92,26.67 R20.2
  Bottom 0.254: v94.49,41.91 93.22,40.64 93.22,30.48 91.95,29.21 v90.68,29.21
LIGHT2  (via drill 0.51)
  Top 0.254: U14.A1 43.18,104.65 v40.64,102.11 | U15.E 36.2,90.68 36.83,90.04 v36.83,89.41 36.83,87.63 36.07,86.87 R37.2
  Bottom 0.254: v40.64,102.11 39.37,100.84 39.37,90.68 38.1,89.41 v36.83,89.41
LIGHT3  (via drill 0.51)
  Top 0.254: U19.A1 97.03,104.65 v94.49,102.11 | U20.E 90.04,90.68 90.68,90.04 v90.68,89.41 90.68,87.63 89.92,86.87 R54.2
  Bottom 0.254: v94.49,102.11 93.22,100.84 93.22,90.68 91.95,89.41 v90.68,89.41
N$1
  Top 0.254: JP10-DNP.3 37.47,42.04 37.68,41.82 R14.2
N$2
  Top 0.254: JP10-DNP.2 38.73,42.93 39.79,41.87 R13.2
N$3
  Top 0.254: R1.2 D1.A
N$4
  Top 0.254: JP9-DNP.3 17.14,45.09 15.24,43.18 13.97,43.18 13.12,42.33 R11.2
N$5
  Top 0.254: U4.2 26.05,27.95 25.82,27.73 C6.1
N$6
  Top 0.254: R18.2 D2.A
N$7
  Top 0.254: R6.2 D3.A
N$8
  Top 0.254: R19.2 D4.A
N$9
  Top 0.254: U7.2 79.89,27.95 79.67,27.73 C10.1
N$10
  Top 0.254: JP10-DNP1.2 92.58,42.93 93.64,41.87 R28.2
N$11
  Top 0.254: JP9-DNP.4 14.61,46.99 12.7,46.99 11.01,45.3 R12.1
N$12
  Top 0.254: JP10-DNP.5 34.92,42.55 33.87,41.49 R15.1
N$13
  Top 0.254: JP10-DNP.4 36.2,47.62 35.56,46.99 33.02,46.99 30.06,44.03 R16.1
N$14
  Top 0.254: JP10-DNP1.3 91.31,42.04 91.53,41.82 R26.2
N$15
  Top 0.254: JP9-DNP1.3 70.99,45.09 69.09,43.18 67.82,43.18 66.97,42.33 R27.2
N$16
  Top 0.254: JP9-DNP1.4 68.45,46.99 66.55,46.99 64.86,45.3 R29.1
N$17
  Top 0.254: JP10-DNP1.5 88.77,42.55 87.72,41.49 R30.1
N$18
  Top 0.254: JP10-DNP1.4 90.04,47.62 89.41,46.99 86.87,46.99 83.91,44.03 R31.1
N$19
  Top 0.254: R35.2 D17.A
N$20
  Top 0.254: R36.2 D18.A
N$21
  Top 0.254: U12.2 26.05,88.15 25.82,87.92 C20.1
N$22
  Top 0.254: JP10-DNP2.2 38.73,103.12 39.79,102.07 R45.2
N$23
  Top 0.254: JP10-DNP2.3 37.47,102.23 37.68,102.02 R43.2
N$24
  Top 0.254: JP9-DNP2.3 17.14,105.28 15.24,103.38 13.97,103.38 13.12,102.53 R44.2
N$25
  Top 0.254: JP9-DNP2.4 14.61,107.19 12.7,107.19 11.01,105.5 R46.1
N$26
  Top 0.254: JP10-DNP2.5 34.92,102.74 33.87,101.69 R47.1
N$27
  Top 0.254: JP10-DNP2.4 36.2,107.82 35.56,107.19 33.02,107.19 30.06,104.23 R48.1
N$28
  Top 0.254: R52.2 D25.A
N$29
  Top 0.254: R53.2 D26.A
N$30
  Top 0.254: U17.2 79.89,88.15 79.67,87.92 C28.1
N$31
  Top 0.254: JP10-DNP3.2 92.58,103.12 93.64,102.07 R62.2
N$32
  Top 0.254: JP10-DNP3.3 91.31,102.23 91.53,102.02 R60.2
N$33
  Top 0.254: JP9-DNP3.3 70.99,105.28 69.09,103.38 67.82,103.38 66.97,102.53 R61.2
N$34
  Top 0.254: JP9-DNP3.4 68.45,107.19 66.55,107.19 64.86,105.5 R63.1
N$35
  Top 0.254: JP10-DNP3.5 88.77,102.74 87.72,101.69 R64.1
N$36
  Top 0.254: JP10-DNP3.4 90.04,107.82 89.41,107.19 86.87,107.19 83.91,104.23 R65.1
PWR_CTL  (via drill 0.51)
  Top 0.254: v16.51,15.24 R9.1
  Bottom 0.254: U1.D6 3.81,39.37 5.08,38.1 5.08,6.35 8.89,2.54 16.51,2.54 17.78,3.81 17.78,13.97 v16.51,15.24
PWR_CTL1  (via drill 0.51)
  Top 0.254: v70.36,15.24 R34.1
  Bottom 0.254: U9.D6 57.66,39.37 58.93,38.1 58.93,6.35 62.74,2.54 70.36,2.54 71.63,3.81 71.63,13.97 v70.36,15.24
PWR_CTL2  (via drill 0.51)
  Top 0.254: v16.51,75.44 R51.1
  Bottom 0.254: U14.D6 3.81,99.57 5.08,98.3 5.08,66.55 8.89,62.74 16.51,62.74 17.78,64.01 17.78,74.17 v16.51,75.44
PWR_CTL3  (via drill 0.51)
  Top 0.254: v70.36,75.44 R68.1
  Bottom 0.254: U19.D6 57.66,99.57 58.93,98.3 58.93,66.55 62.74,62.74 70.36,62.74 71.63,64.01 71.63,74.17 v70.36,75.44
RAIN
  Top 0.254: U1.D2 5.08,49.53 6.35,48.26 6.35,39.37 7.62,38.1 13.97,38.1 14.82,38.95 R11.1 14.82,40.22 15.24,40.64 18.54,40.64 18.93,40.25 D6.1 D5.2
RAIN1
  Top 0.254: U9.D2 58.93,49.53 60.2,48.26 60.2,39.37 61.47,38.1 67.82,38.1 68.67,38.95 R27.1 68.67,40.22 69.09,40.64 72.39,40.64 72.78,40.25 D16.1 D15.2
RAIN6
  Top 0.254: U14.D2 5.08,109.73 6.35,108.46 6.35,99.57 7.62,98.3 13.97,98.3 14.82,99.15 R44.1 14.82,100.42 15.24,100.84 18.54,100.84 18.93,100.45 D24.1 D23.2
RAIN9
  Top 0.254: U19.D2 58.93,109.73 60.2,108.46 60.2,99.57 61.47,98.3 67.82,98.3 68.67,99.15 R61.1 68.67,100.42 69.09,100.84 72.39,100.84 72.78,100.45 D32.1 D31.2
RAW  (via drill 0.51)
  Top 0.254: U2.1 19.36,18.1 19.05,18.41 19.05,19.56 19.49,20 U2.3 | v26.67,20.32 27.94,20.32 28.36,19.9 R8.1
  Top 0.508: U2.3 22.54,20 22.99,20.45 C13.A 26.54,20.45 v26.67,20.32
  Bottom 0.508: U1.VIN 48.26,36.83 46.99,35.56 46.99,21.59 45.72,20.32 v26.67,20.32
RAW1  (via drill 0.51)
  Top 0.254: U6.1 73.21,18.1 72.9,18.41 72.9,19.56 73.34,20 U6.3 | v80.52,20.32 81.79,20.32 82.21,19.9 R33.1
  Top 0.508: U6.3 76.39,20 76.84,20.45 C15.A 80.39,20.45 v80.52,20.32
  Bottom 0.508: U9.VIN 102.11,36.83 100.84,35.56 100.84,21.59 99.57,20.32 v80.52,20.32
RAW2  (via drill 0.51)
  Top 0.254: U11.1 19.36,78.3 19.05,78.61 19.05,79.76 19.49,80.2 U11.3 | v26.67,80.52 27.94,80.52 28.36,80.1 R50.1
  Top 0.508: U11.3 22.54,80.2 22.99,80.65 C23.A 26.54,80.65 v26.67,80.52
  Bottom 0.508: U14.VIN 48.26,97.03 46.99,95.76 46.99,81.79 45.72,80.52 v26.67,80.52
RAW3  (via drill 0.51)
  Top 0.254: U16.1 73.21,78.3 72.9,78.61 72.9,79.76 73.34,80.2 U16.3 | v80.52,80.52 81.79,80.52 82.21,80.1 R67.1
  Top 0.508: U16.3 76.39,80.2 76.84,80.65 C31.A 80.39,80.65 v80.52,80.52
  Bottom 0.508: U19.VIN 102.11,97.03 100.84,95.76 100.84,81.79 99.57,80.52 v80.52,80.52
RXI  (via drill 0.51)
  Top 0.254: S2.4 14.26,6.07 v15.24,5.08
  Bottom 0.254: U1.RX 7.62,54.61 10.16,52.07 10.16,6.35 11.43,5.08 v15.24,5.08
RXI1  (via drill 0.51)
  Top 0.254: S1.4 68.1,6.07 v69.09,5.08
  Bottom 0.254: U9.RX 61.47,54.61 64.01,52.07 64.01,6.35 65.28,5.08 v69.09,5.08
RXI2  (via drill 0.51)
  Top 0.254: S3.4 14.26,66.26 v15.24,65.28
  Bottom 0.254: U14.RX 7.62,114.81 10.16,112.27 10.16,66.55 11.43,65.28 v15.24,65.28
RXI3  (via drill 0.51)
  Top 0.254: S4.4 68.1,66.26 v69.09,65.28
  Bottom 0.254: U19.RX 61.47,114.81 64.01,112.27 64.01,66.55 65.28,65.28 v69.09,65.28
SCL  (via drill 0.51)
  Top 0.254: U5.SCK 21.36,28.98 v22.86,30.48 24.06,31.68 U4.8 | Q2.2 40.32,26.77 R2.2 40.22,25.5 v40.32,25.4
  Bottom 0.254: v22.86,30.48 22.86,26.67 24.13,25.4 v40.32,25.4
SCL1  (via drill 0.51)
  Top 0.254: U8.SCK 75.21,28.98 v76.71,30.48 77.91,31.68 U7.8 | Q4.2 94.17,26.77 R23.2 94.07,25.5 v94.17,25.4
  Bottom 0.254: v76.71,30.48 76.71,26.67 77.98,25.4 v94.17,25.4
SCL2  (via drill 0.51)
  Top 0.254: U13.SCK 21.36,89.18 v22.86,90.68 24.06,91.88 U12.8 | Q6.2 40.32,86.97 R40.2 40.22,85.7 v40.32,85.6
  Bottom 0.254: v22.86,90.68 22.86,86.87 24.13,85.6 v40.32,85.6
SCL3  (via drill 0.51)
  Top 0.254: U18.SCK 75.21,89.18 v76.71,90.68 77.91,91.88 U17.8 | Q8.2 94.17,86.97 R57.2 94.07,85.7 v94.17,85.6
  Bottom 0.254: v76.71,90.68 76.71,86.87 77.98,85.6 v94.17,85.6
SDA  (via drill 0.51)
  Top 0.254: U4.7 26.05,32.38 25.65,32.77 23.37,32.77 22.86,32.26 v22.86,31.75 22.63,31.98 U5.DATA | Q1.2 44.13,26.77 R3.2 44.03,25.82 v44.45,25.4
  Bottom 0.254: v22.86,31.75 24.13,31.75 24.13,27.94 25.4,26.67 43.18,26.67 v44.45,25.4
SDA1  (via drill 0.51)
  Top 0.254: U7.7 79.89,32.38 79.5,32.77 77.22,32.77 76.71,32.26 v76.71,31.75 76.48,31.98 U8.DATA | Q3.2 97.98,26.77 R21.2 97.88,25.82 v98.3,25.4
  Bottom 0.254: v76.71,31.75 77.98,31.75 77.98,27.94 79.25,26.67 97.03,26.67 v98.3,25.4
SDA2  (via drill 0.51)
  Top 0.254: U12.7 26.05,92.57 25.65,92.96 23.37,92.96 22.86,92.46 v22.86,91.95 22.63,92.18 U13.DATA | Q5.2 44.13,86.97 R38.2 44.03,86.02 v44.45,85.6
  Bottom 0.254: v22.86,91.95 24.13,91.95 24.13,88.14 25.4,86.87 43.18,86.87 v44.45,85.6
SDA3  (via drill 0.51)
  Top 0.254: U17.7 79.89,92.57 79.5,92.96 77.22,92.96 76.71,92.46 v76.71,91.95 76.48,92.18 U18.DATA | Q7.2 97.98,86.97 R55.2 97.88,86.02 v98.3,85.6
  Bottom 0.254: v76.71,91.95 77.98,91.95 77.98,88.14 79.25,86.87 97.03,86.87 v98.3,85.6
STAT1
  Top 0.254: U1.D7 5.08,36.83 7.62,34.29 11.43,34.29 12.7,33.02 R1.1
STAT2
  Top 0.254: U1.D8 8.13,33.02 8.89,32.26 R6.1
STAT3
  Top 0.254: U9.D8 61.98,33.02 62.74,32.26 R18.1
STAT4
  Top 0.254: U9.D7 58.93,36.83 61.47,34.29 65.28,34.29 66.55,33.02 R19.1
STAT5
  Top 0.254: U14.D8 8.13,93.22 8.89,92.46 R35.1
STAT6
  Top 0.254: U14.D7 5.08,97.03 7.62,94.49 11.43,94.49 12.7,93.22 R36.1
STAT7
  Top 0.254: U19.D8 61.98,93.22 62.74,92.46 R52.1
STAT8
  Top 0.254: U19.D7 58.93,97.03 61.47,94.49 65.28,94.49 66.55,93.22 R53.1
TXO  (via drill 0.51)
  Top 0.254: S2.1 7.58,6.39 v6.35,7.62
  Bottom 0.254: U1.TX 7.62,52.07 8.89,50.8 8.89,8.89 7.62,7.62 v6.35,7.62
TXO1  (via drill 0.51)
  Top 0.254: S1.1 61.43,6.39 v60.2,7.62
  Bottom 0.254: U9.TX 61.47,52.07 62.74,50.8 62.74,8.89 61.47,7.62 v60.2,7.62
TXO2  (via drill 0.51)
  Top 0.254: S3.1 7.58,66.59 v6.35,67.82
  Bottom 0.254: U14.TX 7.62,112.27 8.89,111 8.89,69.09 7.62,67.82 v6.35,67.82
TXO3  (via drill 0.51)
  Top 0.254: S4.1 61.43,66.59 v60.2,67.82
  Bottom 0.254: U19.TX 61.47,112.27 62.74,111 62.74,69.09 61.47,67.82 v60.2,67.82
V_BATT
  Top 0.254: J1.5 44.64,15.05 45.72,13.97 JP2.2
V_BATT1
  Top 0.254: J2.5 98.49,15.05 99.57,13.97 JP1.2
V_BATT2
  Top 0.254: J3.5 44.64,75.25 45.72,74.17 JP3.2
V_BATT3
  Top 0.254: J4.5 98.49,75.25 99.57,74.17 JP4.2
WDIR
  Top 0.254: D7.2 D8.1 42.03,37.98 41.49,38.52 R13.1 R17.2 43.6,41.06 44.45,41.91 U1.A0
WDIR1
  Top 0.254: D13.2 D14.1 95.88,37.98 95.34,38.52 R28.1 R25.2 97.45,41.06 98.3,41.91 U9.A0
WDIR2
  Top 0.254: D21.2 D22.1 42.03,98.18 41.49,98.72 R45.1 R42.2 43.6,101.26 44.45,102.11 U14.A0
WDIR3
  Top 0.254: D29.2 D30.1 95.88,98.18 95.34,98.72 R62.1 R59.2 97.45,101.26 98.3,102.11 U19.A0
WSPEED
  Top 0.254: U1.D3 3.81,46.99 5.08,45.72 5.08,38.1 7.62,35.56 32.38,35.56 32.9,36.08 D9.2 D10.1 34.41,37.59 34.92,38.1 35.56,38.1 35.98,38.52 R14.1
WSPEED1
  Top 0.254: U9.D3 57.66,46.99 58.93,45.72 58.93,38.1 61.47,35.56 86.23,35.56 86.75,36.08 D11.2 D12.1 88.26,37.59 88.77,38.1 89.41,38.1 89.83,38.52 R26.1
WSPEED2
  Top 0.254: U14.D3 3.81,107.19 5.08,105.92 5.08,98.3 7.62,95.76 32.38,95.76 32.9,96.27 D19.2 D20.1 34.41,97.78 34.92,98.3 35.56,98.3 35.98,98.72 R43.1
WSPEED3
  Top 0.254: U19.D3 57.66,107.19 58.93,105.92 58.93,98.3 61.47,95.76 86.23,95.76 86.75,96.27 D27.2 D28.1 88.26,97.78 88.77,98.3 89.41,98.3 89.83,98.72 R60.1

## Text on the board
Bottom: v11 | v11 | v11 | v11
tPlace: Rain | Wind | Rain | Wind | Humidity | Humidity | Light | Light | Status | Status | Pressure | Pressure | GPS | GPS | - | - | + | + | Soft | Soft | Batt / Bkup | Batt / Bkup | Serial | Serial | Hard | Hard | Weather Shield | Weather Shield | Rain | Wind | Rain | Wind | Humidity | Humidity | Light | Light | Status | Status | Pressure | Pressure | GPS | GPS | - | - | Soft | + | Soft | + | Batt / Bkup | Batt / Bkup | Serial | Serial | Hard | Hard | Weather Shield | Weather Shield